# EAGLE board Awesome_RGB_sync (EAGLE 9.7.0)

Size 698.86 x 375.18 mm. Coordinates in mm from the lower left corner, seen from the top.
Outline: 0,0 698.86,0 698.86,375.18 0,375.18 0,0
Copper layers (1*16): Top 0.035mm / dielectric 1.5mm / Bottom 0.035mm
Design rules "default": minimum track width 6mil, minimum drill 0.35mm, track to track 6mil, track to pad 6mil, pad to pad 6mil, via to via 6mil, smd to smd 6mil, copper to edge 40mil, drill to drill 6mil, minimum pad ring 10mil, minimum via ring 8mil, stop-mask expansion 4mil, vias tented up to drill 0mil, thermal gap 10mil

## Footprints (pad centres in the part's own frame; a part is rotated, then mirrored left to right if it is on the bottom)
WS2812-STRIP = drill 1.016 long: 1 -3.81,0; 2 -1.27,0; 3 1.27,0; 4 3.81,0
BATTERY-GENERIC = drill 1.118 pad 3.15 octagon: + 2.54,0; - -2.54,0
ARDUINO-UNO-R3-SHIELD = drill 1.016 pad 1.88: 3.3V 24.13,-2.54; 5V 24.13,0; A0 24.13,12.7; A1 24.13,15.24; A2 24.13,17.78; A3 24.13,20.32; A4 24.13,22.86; A5 24.13,25.4; AREF -24.13,-13.97; D2 -24.13,20.32; D3 -24.13,17.78; D4 -24.13,15.24; D5 -24.13,12.7; D6 -24.13,10.16; D7 -24.13,7.62; D8 -24.13,3.81; D9 -24.13,1.27; D10 -24.13,-1.27; D11 -24.13,-3.81; D12 -24.13,-6.35; D13 -24.13,-8.89; GND@0 24.13,2.54; GND@1 24.13,5.08; GND@2 -24.13,-11.43; IOREF 24.13,-7.62; NC 24.13,-10.16; RES 24.13,-5.08; RX -24.13,25.4; SCL -24.13,-19.05; SDA -24.13,-16.51; TX -24.13,22.86; VIN 24.13,7.62

## Placement (x,y rotation side)
LED3  WS2812B_STRIP  [WS2812-STRIP]  119.71,7.86 270 top
LED4  WS2812B_STRIP  [WS2812-STRIP]  465.06,7.75 270 top
LED5  WS2812B_STRIP  [WS2812-STRIP]  615.92,7.94 270 top
LED6  WS2812B_STRIP  [WS2812-STRIP]  23.02,7.88 270 top
LED7  WS2812B_STRIP  [WS2812-STRIP]  7.75,360 180 top
LED8  WS2812B_STRIP  [WS2812-STRIP]  691.12,22.22 0 top
LED9  WS2812B_STRIP  [WS2812-STRIP]  664.45,367.44 90 top
LED10  WS2812B_STRIP  [WS2812-STRIP]  293.45,367.33 90 top
P1  BATTERYGENERIC  [BATTERY-GENERIC]  73.27,92.4 180 top
U1  ARDUINO-UNO-R3-SHIELD  [ARDUINO-UNO-R3-SHIELD]  221.5,105.64 270 top

## Library data of the parts
LED3-LED10 P1 U1 = Tinkercad

## Nets
LED3_DOUT: LED3.4 LED4.1
LED4_DOUT: LED4.4 LED5.1
LED5_DOUT: LED5.4 LED8.1
LED7_DOUT: LED6.1 LED7.4
LED8_DOUT: LED8.4 LED9.1
LED9_DOUT: LED9.4 LED10.1
LED10_DOUT: LED7.1 LED10.4
P1+: LED3.2 LED4.2 LED5.2 LED6.2 LED7.2 LED8.2 LED9.2 LED10.2 P1.+
P1-: LED3.3 LED4.3 LED5.3 LED6.3 LED7.3 LED8.3 LED9.3 LED10.3 P1.- U1.GND@0 U1.GND@1 U1.GND@2
U1_D2: LED3.1 U1.D2

## Tracks (layer width: path | path; a pad name or v marks a point on that pad's centre or on a via)
LED3_DOUT  (1 unrouted)
LED4_DOUT  (1 unrouted)
LED5_DOUT  (1 unrouted)
LED7_DOUT  (1 unrouted)
LED8_DOUT  (1 unrouted)
LED9_DOUT  (1 unrouted)
LED10_DOUT  (1 unrouted)
P1+  (8 unrouted)
P1-  (11 unrouted)
U1_D2  (1 unrouted)